# Altium PCB PCBV3.PcbDoc
Units mm, origin at the board's own origin, x right, y up, seen from the top; angles counter-clockwise.
Board outline 25 x 50 mm, 2 copper layers (Top Layer, Bottom Layer); 34 components, 34 nets, 132 pads, 16 vias.
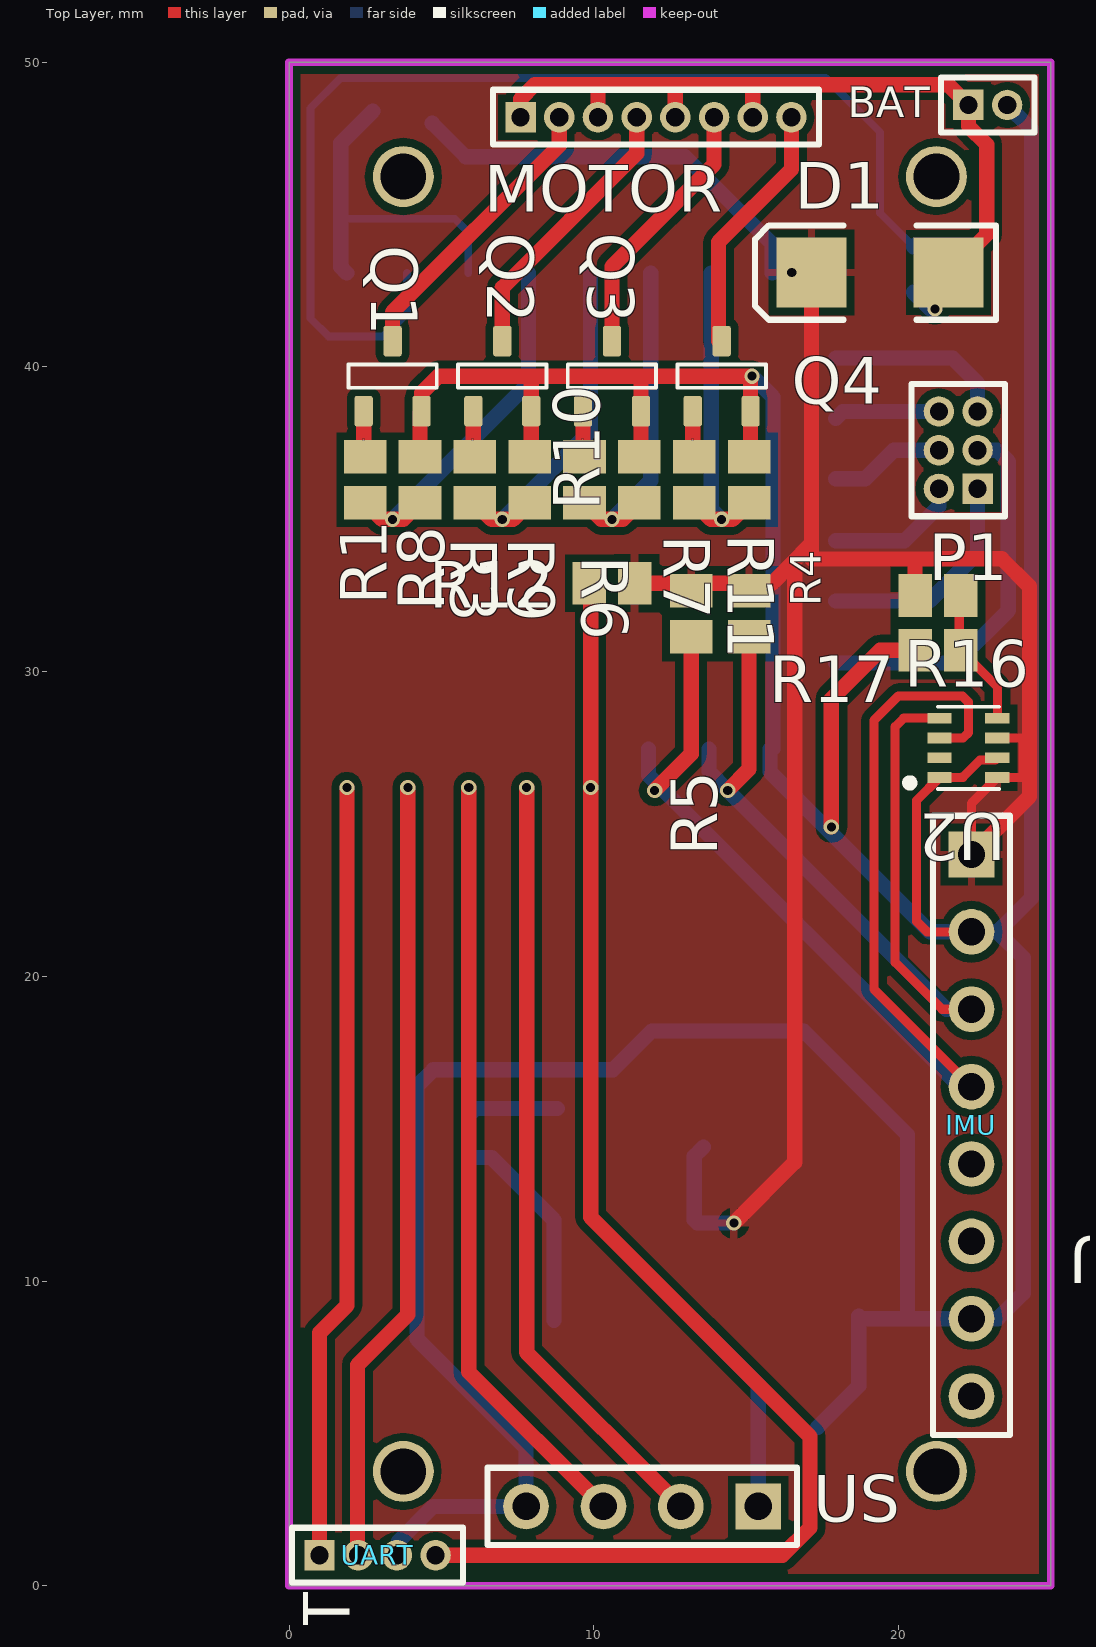
[diagram p0: Top Layer view]
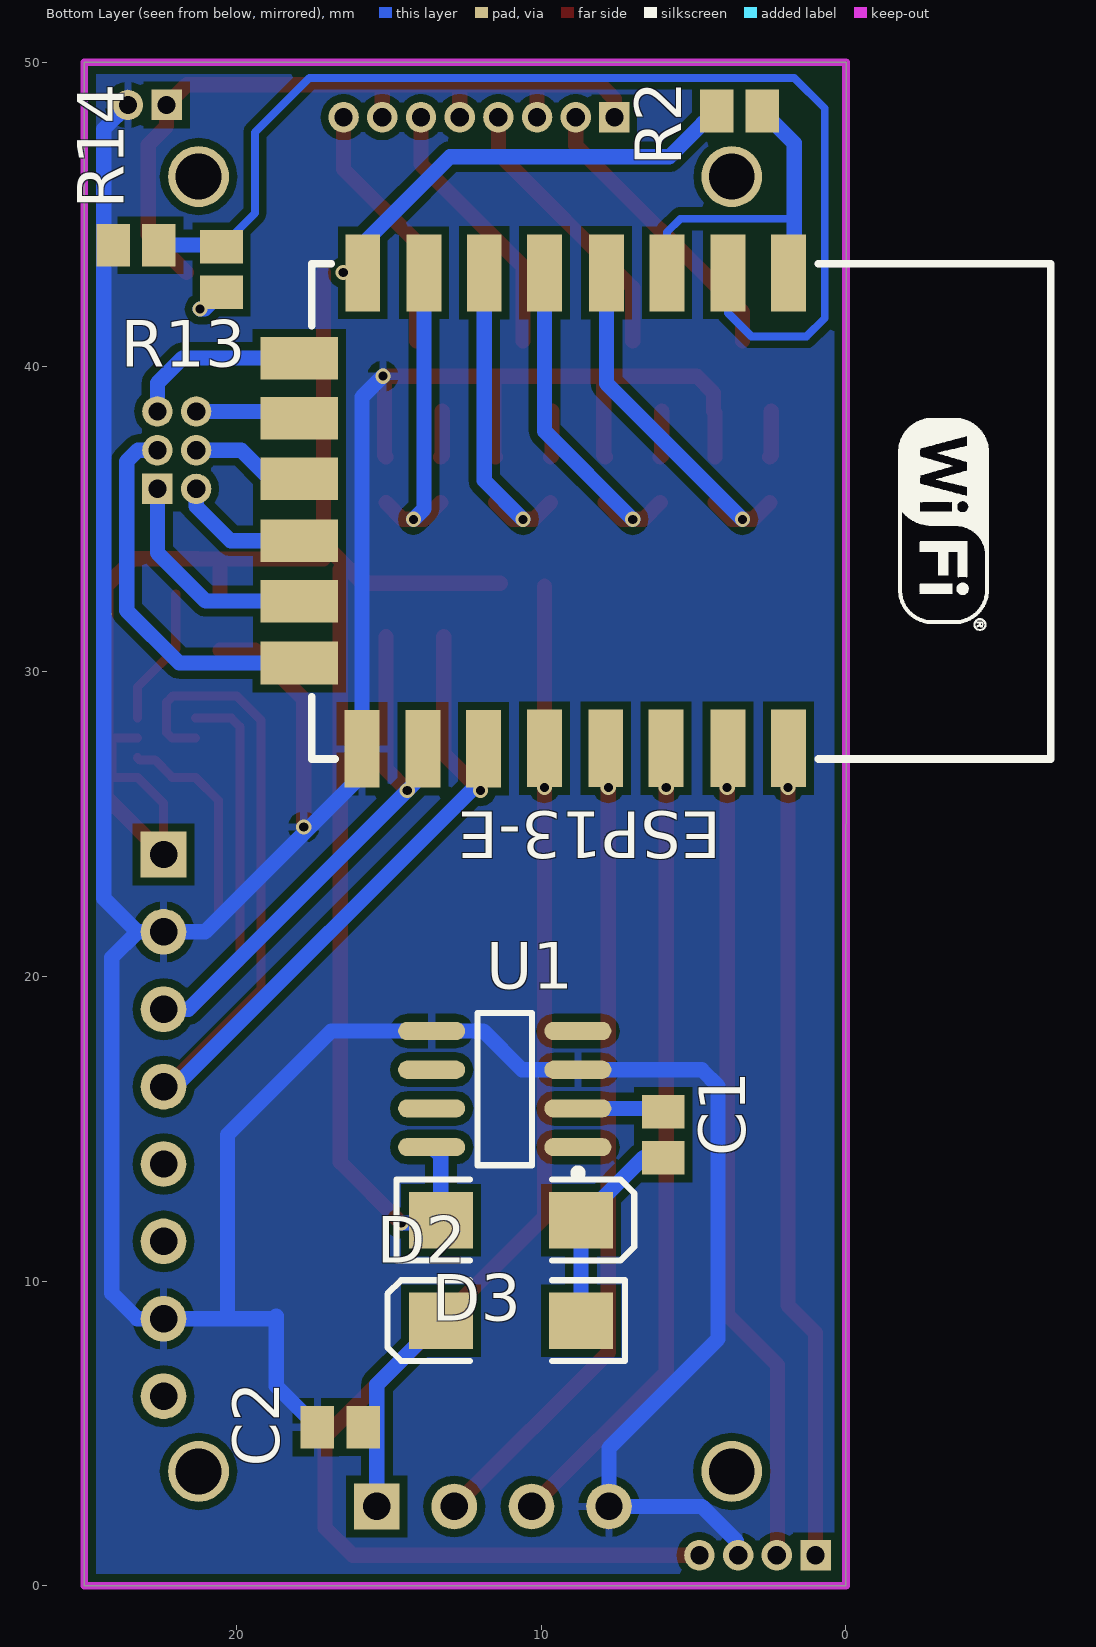
[diagram p1: Bottom Layer view, seen from below]

## Layer stack, top to bottom
Top Solder: solder mask 0.0102, Solder Resist, Dk 3.5
Top Layer: signal copper 0.0356
Dielectric 1: dielectric 0.32, FR-4, Dk 4.8
Bottom Layer: signal copper 0.0356
Bottom Solder: solder mask 0.0102, Solder Resist, Dk 3.5

## Board outline
0,0 25,0 25,50 0,50

## Design rules (kind name [scope] priority, off if disabled: settings)
Clearance [All] p1: gap=0.256
PolygonConnect [All] p1: connectstyle=Relief reliefconductorwidth=0.254 reliefentries=4 polygonreliefangle="90 Angle" airgapwidth=0.254
RoutingVias [All] p1: holewidth=0.711 width=1.27 viastyle="Through Hole" minholewidth=0.711 minwidth=1.27 maxholewidth=0.711 maxwidth=1.27
SolderMaskExpansion [All] p1: expansion=0.102
Width [All] p1: maxlimit=2 minlimit=0.256 preferedwidth=0.5
30 further rules are at their usual default settings.

## Components (designator, comment, footprint, x,y, rotation, side; value= is the part's Value field where it differs from the comment)
BAT "Header 2" MHDR1X2 22.3,48.6 r0 top (schematic designator P1)
C1 "Cap" C0805 6,14.8 r270 bottom
C2 "Cap" C0805 16.6,5.2 r180 bottom
D1 "Diode 1N5402" DSO-C2/X2.3 19.4,43.1 r180 top
D2 "Diode 1N5402" DSO-C2/Z6.7 11,8.7 r0 bottom
D3 "Diode 1N5402" DSO-C2/Z6.7 11,12 r180 bottom
ESP13-E "ESP8266 ESP-12-E" "ESP8266 ESP-12-E B" 18.3,26.5 r270 bottom (schematic designator IC1)
IMU "Header 8" HDR1X8 22.4,24 r270 top (schematic designator P5)
MOTOR "MHDR1X8" MHDR1X8 7.6,48.2 r0 top (schematic designator P3)
P1 "MHDR2X3" MHDR2X3 22.6,36 r90 top
Q1 "MOSFET-N" SOT23-3 3.4,39.7 r90 top
Q2 "MOSFET-N" SOT23-3 7,39.7 r90 top
Q3 "MOSFET-N" SOT23-3 10.6,39.7 r90 top
Q4 "MOSFET-N" SOT23-3 14.2,39.7 r90 top
R1 "Res3" C0805 2.5,36.3 r90 top
R2 "Res3" C0805 3.5,48.4 r180 bottom
R3 "Res3" C0805 6.1,36.3 r90 top
R4 "Res3" C0805 15.1,31.9 r90 top
R5 "Res3" C0805 13.2,31.9 r90 top
R6 "Res3" C0805 9.7,36.3 r90 top
R7 "Res3" C0805 13.3,36.3 r90 top
R8 "Res3" C0805 4.3,36.3 r90 top
R9 "Res3" C0805 7.9,36.3 r90 top
R10 "Res3" C0805 11.5,36.3 r90 top
R11 "Res3" C0805 15.1,36.3 r90 top
R12 "Res3" C0805 10.6,32.9 r180 top
R13 "Res3" C0805 20.5,43.2 r90 bottom
R14 "Res3" C0805 23.3,44 r0 bottom
R16 "Res3" C0805 21.3,32.5 r180 top
R17 "Res3" C0805 21.3,30.7 r180 top
U1 "LMC7660IM" M08A_N 11.2,16.3 r0 bottom
U2 "BMP280" LGA-8_BMP280(Primary) 22.3,27.5 r180 top
UART "MHDR1X4" MHDR1X4 1,1 r0 top (schematic designator P2)
US "Header 4" HDR1X4 15.4,2.6 r180 top (schematic designator P4)

## Footprints (in the part's own frame and the unit in brackets; to place one, negate y for a bottom-side part, rotate by r counter-clockwise, add the part's x,y. Pads: shape width x height; smd on the part's side, far side on the other; paste and mask are expansions set on the pad)
C0805 [mm] "Chip Capacitor, Body 2.0x1.3mm, IPC High Density"
  rect 1.1x1.4 smd: 1(-0.75,0) 2(0.75,0)
  body extent -1.1,-0.72 1.1,0.72, height 1.4
DSO-C2/X2.3 [mm] "DO-214-AA/SMB; 2 C-Bend Leads; Body 5.3 x 3.6 mm, inc. leads (LxW)"
  rect 2.3x2.3 smd: 1(-2.25,0) 2(2.25,0)
  silkscreen extent -3.8,-1.55 4.1,1.55
DSO-C2/Z6.7 [mm] "DO-214-AC/SMA; 2 C-Bend Leads; Body 5.3 x 2.6 mm, inc. leads (LxW)"
  rect 2.1x1.85 smd: 1(-2.3,0) 2(2.3,0)
  silkscreen extent -3.75,-1.33 4.05,1.33
"ESP8266 ESP-12-E B" [mil] "ESP8266 ESP-12-E"
  rect 100x45 smd: 1(-653,646) 2(-653,568) 3(-653,489) 4(-653,411) 5(-653,331) 6(-653,253) 7(-653,175) 8(-653,96) 15(-38,95) 16(-38,174) 17(-38,252) 18(-39,331) 19(-39,410) 20(-39,488) 21(-39,568) 22(-39,646)
  rect 55x100 smd: 9(-543,14) 10(-465,14) 11(-387,14) 12(-307,14) 13(-229,14) 14(-149,14)
  silkscreen extent -665,30 -25,985
HDR1X4 [mm] "Connector; Header; 4 Position"
  rect 1.5x1.5 hole 0.9: 1(0,0)
  round 1.5 hole 0.9: 2(2.54,0) 3(5.08,0) 4(7.62,0)
  silkscreen extent -1.27,-1.27 8.89,1.27
HDR1X8 [mm] "Connector; Header; 8 Position"
  rect 1.5x1.5 hole 0.9: 1(0,0)
  round 1.5 hole 0.9: 2(2.54,0) 3(5.08,0) 4(7.62,0) 5(10.16,0) 6(12.7,0) 7(15.24,0) 8(17.78,0)
  silkscreen extent -1.27,-1.27 19.05,1.27
LGA-8_BMP280(Primary) [mm]
  rect 0.8x0.35 smd paste-25.4 mask-25.4: 1(0.95,0.975) 2(0.95,0.325) 3(0.95,-0.325) 4(0.95,-0.975) 5(-0.95,-0.975) 6(-0.95,-0.325) 7(-0.95,0.325) 8(-0.95,0.975)
  silkscreen extent -1,-1.35 2.02,1.35
M08A_N [mm] "SOIC, 8-Leads, Body 4.9x3.9mm, Pitch 1.27mm, IPC Medium Density"
  oval 2.2x0.6 smd: 1(-2.4,1.905) 2(-2.4,0.635) 3(-2.4,-0.635) 4(-2.4,-1.905) 5(2.4,-1.905) 6(2.4,-0.635) 7(2.4,0.635) 8(2.4,1.905)
  silkscreen extent -2.52,-2.5 0.9,2.88, body extent -2,-2.5 2,2.5, height 1.75
MHDR1X2 [mm] "Connector; Header; 2 Position"
  rect 1x1 hole 0.6: 1(0,0)
  round 1 hole 0.6: 2(1.27,0)
  silkscreen extent -0.9,-0.9 2.17,0.9
MHDR1X4 [mm] "Connector; Header; 4 Position"
  rect 1x1 hole 0.6: 1(0,0)
  round 1 hole 0.6: 2(1.27,0) 3(2.54,0) 4(3.81,0)
  silkscreen extent -0.9,-0.9 4.71,0.9
MHDR1X8 [mm] "Connector; Header; 8 Position"
  rect 1x1 hole 0.6: 1(0,0)
  round 1 hole 0.6: 2(1.27,0) 3(2.54,0) 4(3.81,0) 5(5.08,0) 6(6.35,0) 7(7.62,0) 8(8.89,0)
  silkscreen extent -0.9,-0.9 9.79,0.9
MHDR2X3 [mm] "Connector; Header; 3x2 Position"
  rect 1x1 hole 0.6: 1(0,0)
  round 1 hole 0.6: 2(0,1.27) 3(1.27,0) 4(1.27,1.27) 5(2.54,0) 6(2.54,1.27)
  silkscreen extent -0.9,-0.9 3.44,2.17
SOT23-3 [mm] "SOT23, 3 pin"
  round 0.5 on Mech15: 0(0,0)
  rrect25% 1x0.6 smd: 1(-1.15,0.95) 2(-1.15,-0.95) 3(1.15,0)
  silkscreen extent -0.38,-1.45 0.38,1.45, body extent -1.4,-1.45 1.4,1.45, height 1.29

## Part data
BAT: "Header, 2-Pin"
C1 C2: "Capacitor"
D1 D2 D3: "3 Amp General Purpose Rectifier"
IMU MOTOR: "Header, 8-Pin"
P1: "Header, 3-Pin, Dual row"
Q1 Q2 Q3 Q4: "N-Channel MOSFET"
R1 R2 R3 R4 R5 R6 R7 R8 R9 R10 R11 R12 R13 R14 R16 R17: "Resistor"
U1: "Switched Capacitor Voltage Converter, 8-pin Narrow SOIC"
U2: "Barometro"
UART US: "Header, 4-Pin"

## Free pads (board coordinates)
  round 2 hole 1.5: 1(3.75,46.25) 2(21.25,46.25) 3(21.25,3.75) 4(3.75,3.75)

## Via types
v1: diameter 0.5, hole 0.3, Top Layer to Bottom Layer, 16 vias

## Nets (pads, with @x,y where several pads share a name; then routed paths per layer and width w, separated by ;. In a path a pad name is that pad's centre, name@x,y a point inside that pad or via, vN(x,y) a via of type N, cw(c..) or ccw(c..) an arc to the next point about the centre after c; other vN are vias at no path point)
5VCC: C2.2 D2.2 US.1 | length 7
  Bottom Layer w0.5: D2.2 15.4,6.6 US.1
ADC: ESP13-E.2 R13.2 R14.1 | length 40.1
  Bottom Layer w0.256: ESP13-E.2 3.873,41.773 3.1,41 1.3,41 0.7,41.6 0.7,48.488 1.7,49.488 17.612,49.488 19.4,47.7 19.4,45.05 R13.2 22.5,43.95 R14.1
  Bottom Layer w0.5: R13.2 20.55,44 R14.1
BOOT: ESP13-E.18 R12.2 UART.4 | length 46.5
  Top Layer w0.5: UART.4 16.2,1 17.1,1.9 17.1,4.9 9.9,12.1 v1(9.9,26.2) R12.2@9.9,32.8
ECHO: ESP13-E.20 US.3 | length 25.4
  Top Layer w0.5: v1(5.9,26.2) 5.9,7.02 US.3
GND: BAT.2 C2.1 ESP13-E.15 IMU.2 IMU.7 Q1.2 Q2.2 Q3.2 Q4.2 R8.2 R9.2 R10.2 R11.2 R14.2 R17.2 U1.3 U1.5 U2.1 U2.7 UART.3 US.4 | length 155.8
  Top Layer w0.3: IMU.2 20.94,21.46 20.6,21.8 20.6,25.775 U2.1 22.125,26.525 22.125,26.549 22.682,27.106 23.181,27.106 U2.7
  Top Layer w0.5: R8.2 4.3,38.5 Q1.2 4.35,39.15 4.9,39.7 8,39.7 ; R9.2 7.95,37.1 Q2.2 7.95,39.65 8,39.7 ; R10.2 11.55,37.1 Q3.2 11.55,39.65 11.5,39.7 ; R11.2 15.15,37.1 Q4.2 15.15,39.65 v1(15.2,39.7) 11.5,39.7 ; v1(17.8,24.9) 17.8,29.1 19.4,30.7 R17.2 ; 8,39.7 11.5,39.7
  Bottom Layer w0.5: UART.3 3.6,1.06 3.6,1.47 4.73,2.6 US.4 7.78,4.52 4.2,8.1 4.2,16.4 4.735,16.935 U1.3 10.635,16.935 11.905,18.205 U1.5 16.895,18.205 20.3,14.8 20.3,8.76 ; v1(15.2,39.7) 15.887,39.013 ESP13-E.15 ; ESP13-E.15@15.787,27.465 15.787,26.713 21.04,21.46 IMU.2 23.26,21.46 ; C2.1 18.7,6.55 18.7,8.85 18.79,8.76 20.3,8.76 ; BAT.2 24.366,47.804 24.366,22.566 23.26,21.46 ; 20.3,8.76 IMU.7 23.26,8.76 24.1,9.6 24.1,20.62 23.26,21.46
GPIO_1: ESP13-E.9 P1.5 | length 5.9
  Bottom Layer w0.5: ESP13-E.9 21.782,40.292 22.6,39.474 P1.5
GPIO_2: ESP13-E.10 P1.6 | length 3.5
  Bottom Layer w0.5: ESP13-E.10 18.173,38.54 P1.6
GPIO_3: ESP13-E.11 P1.4 | length 3.8
  Bottom Layer w0.5: ESP13-E.11 18.911,36.33 19.852,37.27 P1.4
GPIO_4: ESP13-E.14 P1.3 | length 12.4
  Bottom Layer w0.5: ESP13-E.14 21.885,30.285 23.61,32.01 23.61,36.9 23.24,37.27 P1.3
GPIO_5: ESP13-E.13 P1.1 | length 7.4
  Bottom Layer w0.5: ESP13-E.13 21.017,32.317 22.6,33.9 P1.1
GPIO_6: ESP13-E.12 P1.2 | length 4.4
  Bottom Layer w0.5: ESP13-E.12 20.198,34.298 21.33,35.43 P1.2
I2C_SCL: ESP13-E.16 IMU.3 R4.1 U2.4 | length 30.4
  Top Layer w0.3: U2.4 20.175,28.475 19.893,28.193 19.893,20.463 21.436,18.92 IMU.3
  Top Layer w0.5: v1(14.4,26.1) 15.1,26.8 R4.1
  Bottom Layer w0.5: ESP13-E.16@13.78,27.465 13.78,26.72 v1(14.4,26.1) 21.58,18.92 IMU.3
I2C_SDA: ESP13-E.17 IMU.4 R5.1 U2.3 | length 40.1
  Top Layer w0.3: U2.3 22.125,27.825 22.3,28 22.3,29 22.1,29.2 20,29.2 19.2,28.4 19.2,19.58 IMU.4
  Top Layer w0.5: v1(12,26.1) 13.2,27.3 R5.1
  Bottom Layer w0.5: ESP13-E.17@11.799,27.465 11.799,26.601 22.02,16.38 IMU.4
NetC1_1: C1.1 U1.2 | length 2.8
  Bottom Layer w0.5: C1.1 6.115,15.665 U1.2
NetC1_2: C1.2 D2.1 D3.2 | length 6.8
  Bottom Layer w0.5: C1.2 6.65,14.05 D3.2 D2.1
NetESP13-E_1: ESP13-E.1 ESP13-E.3 R2.2 | length 11.5
  Bottom Layer w0.256: 1.7,44.9 1.734,44.866 5.434,44.866 5.879,44.421 ESP13-E.3
  Bottom Layer w0.5: ESP13-E.1 1.7,43.278 1.7,44.9 1.7,47.35 R2.2
NetMOTOR_2: MOTOR.2 Q1.3 | length 9.6
  Top Layer w0.5: Q1.3 3.4,41.8 8.87,47.27 MOTOR.2
NetMOTOR_4: MOTOR.4 Q2.3 | length 9.2
  Top Layer w0.5: Q2.3 7,42.6 11.41,47.01 MOTOR.4
NetMOTOR_6: MOTOR.6 Q3.3 | length 8.7
  Top Layer w0.5: Q3.3 10.6,43.3 13.95,46.65 MOTOR.6
NetMOTOR_8: MOTOR.8 Q4.3 | length 8.3
  Top Layer w0.5: Q4.3@14.1,40.85 14.1,44.1 16.49,46.49 MOTOR.8
NetQ1_2: Q1.1 R1.2 | length 1.5
  Top Layer w0.5: Q1.1 2.45,37.1 R1.2
NetQ2_2: Q2.1 R3.2 | length 1.5
  Top Layer w0.5: Q2.1 6.05,37.1 R3.2
NetQ3_2: Q3.1 R6.2 | length 1.5
  Top Layer w0.5: Q3.1 9.65,37.1 R6.2
NetQ4_2: Q4.1 R7.2 | length 1.5
  Top Layer w0.5: Q4.1 13.25,37.1 R7.2
NetR16_1: R16.1 R17.1 U2.5 | length 4.6
  Top Layer w0.3: R16.1@22,32.55 22,30.75 R17.1 23.25,29.5 U2.5
PWM0: ESP13-E.4 R1.1 R8.1 | length 12.2
  Top Layer w0.5: R1.1 3.05,35 v1(3.4,35) 3.75,35 R8.1
  Bottom Layer w0.5: v1(3.4,35) 7.861,39.461 ESP13-E.4
PWM1: ESP13-E.5 R3.1 R9.1 | length 11.5
  Top Layer w0.5: R3.1 6.65,35 v1(7,35) 7.35,35 R9.1
  Bottom Layer w0.5: v1(7,35) 9.893,37.893 ESP13-E.5
PWM2: ESP13-E.6 R6.1 R10.1 | length 10.9
  Top Layer w0.5: R6.1 10.25,35 v1(10.6,35) 10.95,35 R10.1
  Bottom Layer w0.5: v1(10.6,35) 11.874,36.274 ESP13-E.6
PWM3: ESP13-E.7 R7.1 R11.1 | length 10.5
  Top Layer w0.5: R7.1 13.85,35 v1(14.2,35) 14.55,35 R11.1
  Bottom Layer w0.5: ESP13-E.7 13.855,35.345 v1(14.2,35)
RX: ESP13-E.21 UART.2 | length 25.9
  Top Layer w0.5: UART.2 2.244,1.026 2.244,7.244 3.9,8.9 v1(3.9,26.2)
TRIGER: ESP13-E.19 US.2 | length 25.7
  Top Layer w0.5: v1(7.8,26.2) 7.8,7.66 US.2
TX: ESP13-E.22 UART.1 | length 25.6
  Top Layer w0.5: UART.1 1,8.3 1.9,9.2 v1(1.9,26.2)
VCC: D1.2 D3.1 ESP13-E.8 IMU.1 R2.1 R4.2 R5.2 R12.1 R16.2 U1.8 U2.6 U2.8 | length 80.1
  Top Layer w0.3: IMU.1 22.4,25.675 U2.8 24.1,26.525 24.1,27.825 U2.6
  Top Layer w0.5: R12.1 15.85,32.9 16.45,33.5 ; v1(14.6,11.9) 16.6,13.9 16.6,33.35 16.45,33.5 ; 17.15,34.2 16.45,33.5 ; D1.2 17.15,33.7 20.5,33.7 ; R16.2 20.55,33.65 20.5,33.7 ; IMU.1 24.3,25.9 24.3,32.8 23.394,33.706 21.29,33.706 21.284,33.7 20.5,33.7
  Bottom Layer w0.5: R2.1@4.7,48 5.8,46.9 13,46.9 15.862,44.038 ESP13-E.8 ; U1.8 13.3,14.095 D3.1 13.4,11.9 v1(14.6,11.9)
  other v1: 16.5,43.1
VCC_BAT: BAT.1 D1.1 MOTOR.1 MOTOR.3 MOTOR.5 MOTOR.7 R13.1 | length 26
  Top Layer w0.5: MOTOR.1@7.6,48.4 7.6,48.8 8.066,49.266 10.1,49.266 ; MOTOR.3 10.14,49.226 10.1,49.266 ; MOTOR.5 12.68,49.246 12.7,49.266 ; MOTOR.7 15.22,49.146 15.1,49.266 ; D1.1 22.9,44.35 22.9,47.3 22.3,47.9 BAT.1 21.634,49.266 15.1,49.266 ; 10.1,49.266 12.7,49.266 ; 12.7,49.266 15.1,49.266
  Bottom Layer w0.5: R13.1 21.05,41.9 v1(21.2,41.9)
pads on no net: IMU.5 IMU.6 IMU.8 Q1.0 Q2.0 Q3.0 Q4.0 U1.1 U1.4 U1.6 U1.7 U2.2

## Polygon pours and split planes (outlines as drawn)
VCC on Top Layer "Plano_VCC" (solid, pour order 22): 0,0 25,0 25,50 0,50
GND on Bottom Layer "Plano_GND" (solid, pour order 24): 0,0 25,0 25,50 0,50

## Keep-outs
Keep-Out Layer:
  the board outline again, w0.256

## Text inside footprints (layer, text, board x,y; h text height)
ESP13-E: Mechanical 13 "CUTOUT POLYGON" at -5.591,43.085 h0.25 r90; Mechanical 13 "ANTENNA AREA" at -6.099,43.085 h0.25 r90